# EAGLE board wakeup (EAGLE 7.7.0)
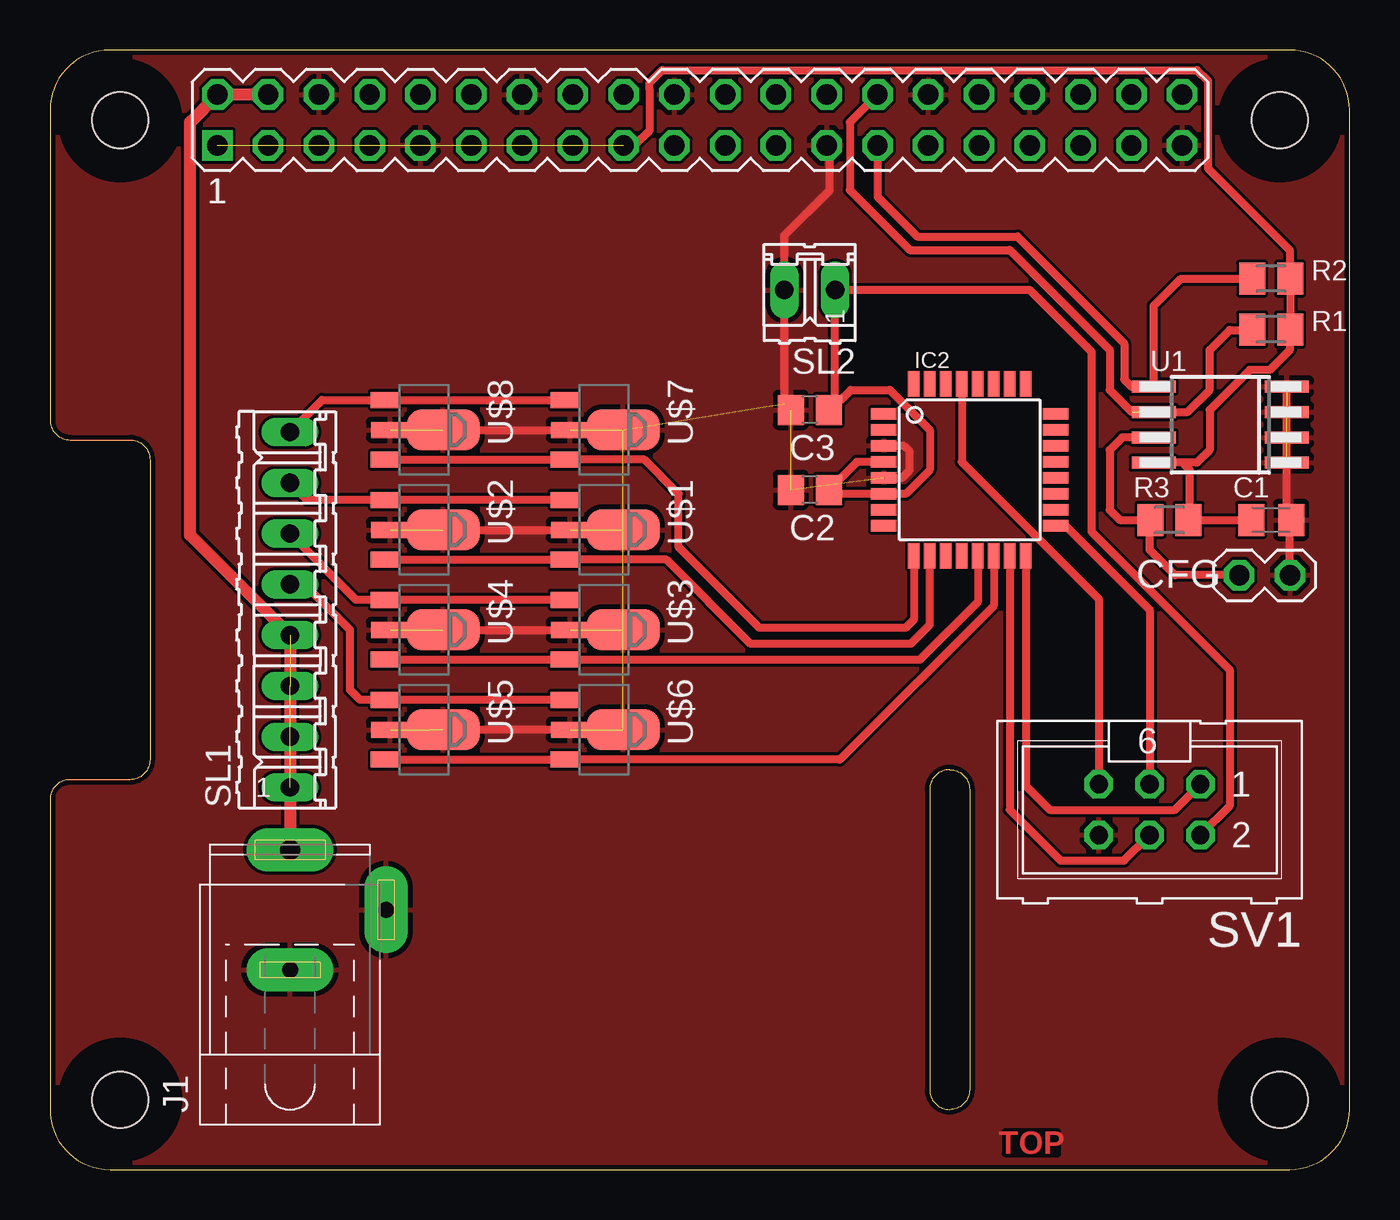
[diagram p0: board, top side]
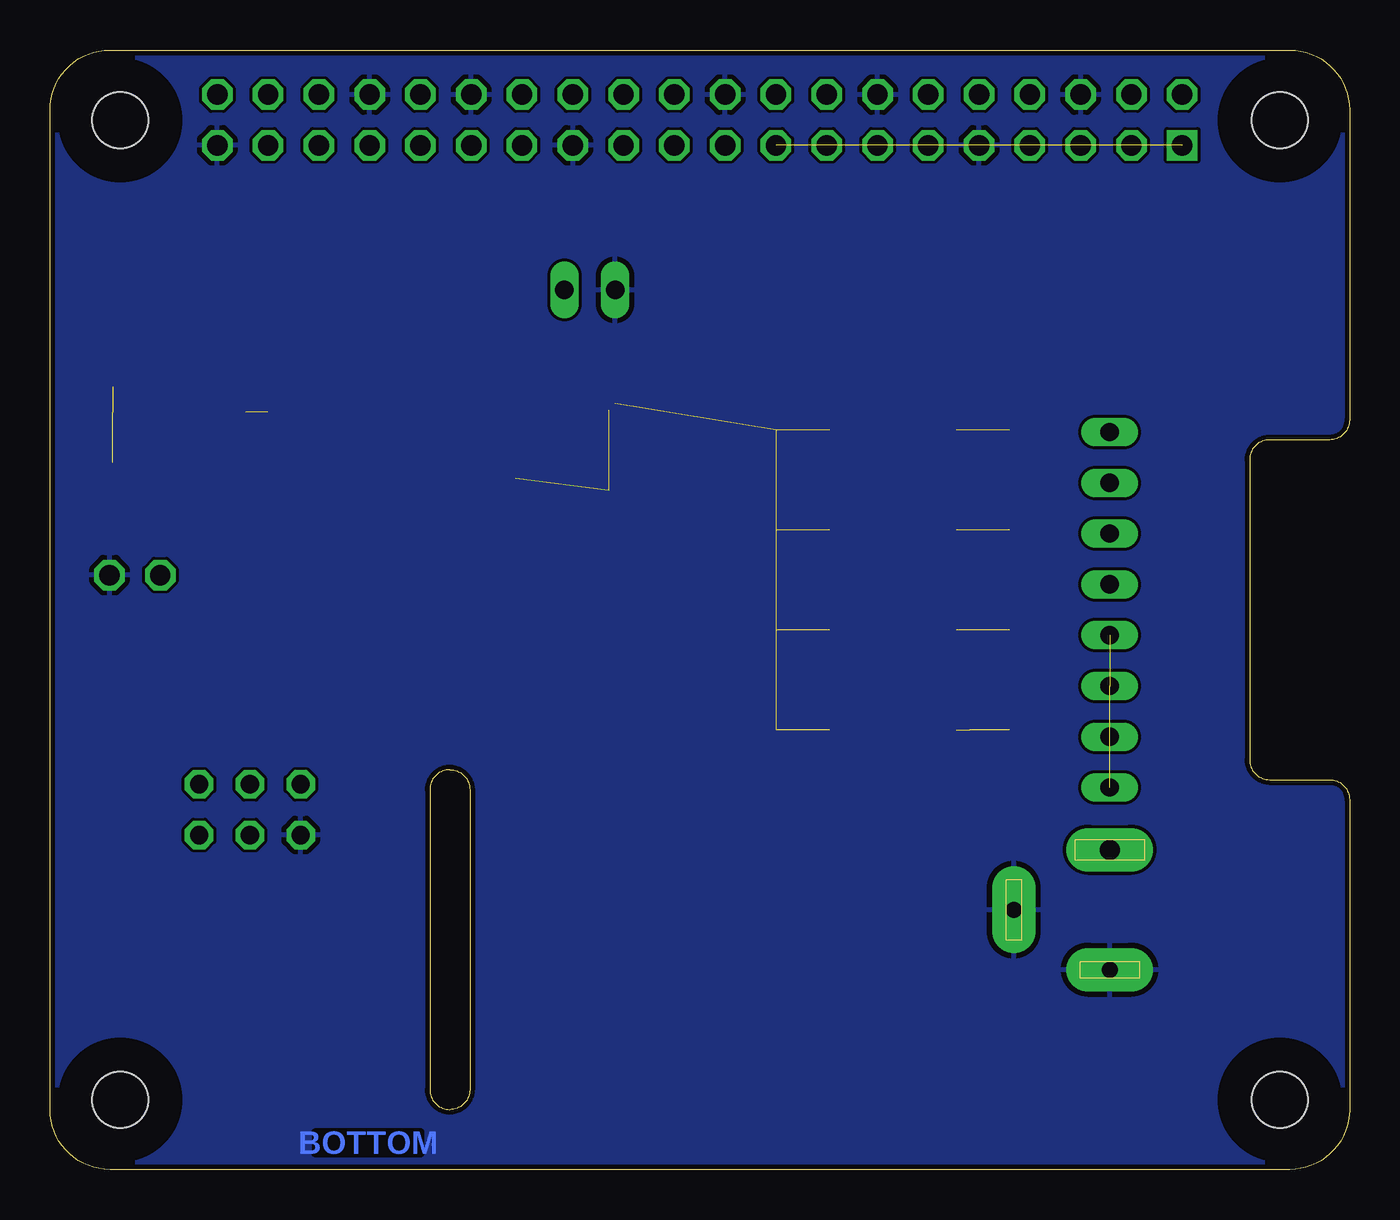
[diagram p1: board, bottom side, seen from below]

Size 65 x 56 mm. Coordinates in mm from the lower left corner, seen from the top.
Outline: 0,3 arc90 3,0 62,0 arc90 65,3 65,53 arc90 62,56 3,56 arc90 0,53 0,37.5 arc90 1,36.5 4,36.5 arc-90 5,35.5 5,20.5 arc-90 4,19.5 1,19.5 arc90 0,18.5 0,3
Outline: 44,19 44,4 arc90 45,3 arc90 46,4 46,19 arc90 45,20 arc90 44,19
Copper layers (1*16): Top 0.035mm / dielectric 1.5mm / Bottom 0.035mm
Design rules "ITEADstudio_DRC *": minimum track width 6mil, minimum drill 12mil, track to track 6mil, track to pad 6mil, pad to pad 6mil, via to via 6mil, smd to smd 0mil, copper to edge 10mil, drill to drill 10mil, minimum pad ring 10mil, minimum via ring 6mil, stop-mask expansion 2mil, vias tented up to drill 100mil, thermal gap 10mil
Holes 2.8 mm at 3.5,3.5 3.5,52.5 61.5,52.5 61.5,3.5
tRestrict: area 1.9,51 to 5,54; area 60,51 to 63,54; area 60,1.9 to 63,5; area 1.9,1.9 to 5,5
bRestrict: area 1.9,1.9 to 5,5; area 1.9,51 to 5,54; area 60,1.9 to 63,5; area 60,51 to 63,54
Milling: 6 lines

## Footprints (pad centres in the part's own frame; a part is rotated, then mirrored left to right if it is on the bottom)
C0805K = smd 1.3 x 1.6: 1 -1,0; 2 1,0
C0805 = smd 1.3 x 1.5: 1 -0.95,0; 2 0.95,0
PIN_W_2 = drill 1.016 octagon: 1 0,0; 2 0,-2.54
TQFP32-08 = smd 1.27 x 0.559: 1 -4.293,2.8; 2 -4.293,2; 3 -4.293,1.2; 4 -4.293,0.4; 5 -4.293,-0.4; 6 -4.293,-1.2; 7 -4.293,-2; 8 -4.293,-2.8; 17 4.293,-2.8; 18 4.293,-2; 19 4.293,-1.2; 20 4.293,-0.4; 21 4.293,0.4; 22 4.293,1.2; 23 4.293,2; 24 4.293,2.8 | smd 0.559 x 1.27: 9 -2.8,-4.293; 10 -2,-4.293; 11 -1.2,-4.293; 12 -0.4,-4.293; 13 0.4,-4.293; 14 1.2,-4.293; 15 2,-4.293; 16 2.8,-4.293; 25 2.8,4.293; 26 2,4.293; 27 1.2,4.293; 28 0.4,4.293; 29 -0.4,4.293; 30 -1.2,4.293; 31 -2,4.293; 32 -2.8,4.293
SPC4078 = drill 0.8 pad 2.184 long: 1 -3,0; 2 0,-4.8 | drill 1 pad 2.184 long: 3 3,0
PIN_20X2 = drill 1.016 square: 1 -24.13,-1.27 | drill 1.016 octagon: 2 -24.13,1.27; 3 -21.59,-1.27; 4 -21.59,1.27; 5 -19.05,-1.27; 6 -19.05,1.27; 7 -16.51,-1.27; 8 -16.51,1.27; 9 -13.97,-1.27; 10 -13.97,1.27; 11 -11.43,-1.27; 12 -11.43,1.27; 13 -8.89,-1.27; 14 -8.89,1.27; 15 -6.35,-1.27; 16 -6.35,1.27; 17 -3.81,-1.27; 18 -3.81,1.27; 19 -1.27,-1.27; 20 -1.27,1.27; 21 1.27,-1.27; 22 1.27,1.27; 23 3.81,-1.27; 24 3.81,1.27; 25 6.35,-1.27; 26 6.35,1.27; 27 8.89,-1.27; 28 8.89,1.27; 29 11.43,-1.27; 30 11.43,1.27; 31 13.97,-1.27; 32 13.97,1.27; 33 16.51,-1.27; 34 16.51,1.27; 35 19.05,-1.27; 36 19.05,1.27; 37 21.59,-1.27; 38 21.59,1.27; 39 24.13,-1.27; 40 24.13,1.27
M0805 = smd 1.3 x 1.6: 1 -0.95,0; 2 0.95,0
08P = drill 0.914 long: 1 -8.89,0; 2 -6.35,0; 3 -3.81,0; 4 -1.27,0; 5 1.27,0; 6 3.81,0; 7 6.35,0; 8 8.89,0
02P = drill 0.914 long: 1 -1.27,0; 2 1.27,0
ML6 = drill 0.914 octagon: 1 -2.54,-1.27; 2 -2.54,1.27; 3 0,-1.27; 4 0,1.27; 5 2.54,-1.27; 6 2.54,1.27
SOIC8 = smd 0.6 x 2.2: 1 -1.905,-3.33; 2 -0.635,-3.33; 3 0.635,-3.33; 4 1.905,-3.33; 5 1.905,3.33; 6 0.635,3.33; 7 -0.635,3.33; 8 -1.905,3.33
SOT = smd 0.8 x 1.4: 1 -1.499,-3.251; 3 1.499,-3.251 | smd 0.8 x 1.9: 2 0,-2.997 | smd 2.032 x 3.65: 2@1 0,-0.33

## Placement (x,y rotation side)
C1  100nF  [C0805K]  61.08,32.5 0 top
C2  47nF  [C0805]  38,34 180 top
C3  47nF  [C0805]  38,38 180 top
CFG  [PIN_W_2]  59.48,29.73 90 top
IC2  ATMEGA48/88/168-AU  [TQFP32-08]  46,35 0 top
J1  [SPC4078]  12,13 90 top
K1  PIN20X2  [PIN_20X2]  32.5,52.5 0 top
R1  3k9  [M0805]  61.08,42.02 0 top
R2  3k9  [M0805]  61.08,44.56 0 top
R3  1k  [M0805]  55.99,32.5 0 top
SL1  [08P]  12,28 90 top
SL2  [02P]  38,44 180 top
SV1  [ML6]  55,18 180 top
U1  EEPROM24  [SOIC8]  58.53,37.26 90 top
U$1  AMC7135  [SOT]  29,32 270 top
U$2  AMC7135  [SOT]  20,32 270 top
U$3  AMC7135  [SOT]  29,27 270 top
U$4  AMC7135  [SOT]  20,27 270 top
U$5  AMC7135  [SOT]  20,22 270 top
U$6  AMC7135  [SOT]  29,22 270 top
U$7  AMC7135  [SOT]  29,37 270 top
U$8  AMC7135  [SOT]  20,37 270 top

## Library data of the parts
C1 = resistor; DIELECTRIC: X7R
C2 C3 = rcl
CFG K1 U1 = FLYFISH
IC2 = atmega8
J1 = con-jack; OC_FARNELL: unknown; OC_NEWARK: unknown
R1-R3 = resistor; TOLERANCE: 5%
SL1 SL2 = con-amp-quick; OC_FARNELL: unknown; OC_NEWARK: unknown
SV1 = con-ml; OC_FARNELL: unknown; OC_NEWARK: unknown
U$1-U$8 = 1

## Nets
+3V3: C1.1 K1.1 K1.17 R1.2 R2.2 R3.2 U1.8
+5V: J1.3 K1.2 K1.4 SL1.1 SL1.2 SL1.3 SL1.4
AGND: IC2.21
BLUE_LED: IC2.13 U$3.3 U$4.3
BLUE_LED_OUT: SL1.6 U$3.1 U$4.1
GND: C1.2 C2.2 C3.2 CFG.2 IC2.3 IC2.5 J1.1 J1.2 K1.6 K1.9 K1.14 K1.20 K1.25 K1.30 K1.34 K1.39 SL2.2 SV1.6 U1.1 U1.2 U1.3 U1.4 U$1.2 U$1.2@1 U$2.2 U$2.2@1 U$3.2 U$3.2@1 U$4.2 U$4.2@1 U$5.2 U$5.2@1 U$6.2 U$6.2@1 U$7.2 U$7.2@1 U$8.2 U$8.2@1
GREEN_LED: IC2.10 U$1.3 U$2.3
GREEN_LED_OUT: SL1.7 U$1.1 U$2.1
I2C_SCL1: K1.5
I2C_SDA1: K1.3
MISO: IC2.16 SV1.1
MISO_SPI: K1.21
MOSI: IC2.15 SV1.4
MOSI_SPI: K1.19
N$3: CFG.1 R3.1 U1.7
RED_LED: IC2.9 U$7.3 U$8.3
RED_LED_OUT: SL1.8 U$7.1 U$8.1
RESET: IC2.29 SV1.5
SCK: IC2.17 SV1.3
SCL0_I2C_ID_EEPROM: K1.28 R1.1 U1.6
SCLK_SPI: K1.23
SDA0_I2C_ID_EEPROM: K1.27 R2.1 U1.5
VCC: C2.1 C3.1 IC2.4 IC2.6 SL2.1 SV1.2
WHITE_LED: IC2.14 U$5.3 U$6.3
WHITE_LED_OUT: SL1.5 U$5.1 U$6.1

## Tracks (layer width: path | path; a pad name or v marks a point on that pad's centre or on a via)
+3V3  (1 unrouted)
  Top 0.406: C1.1 R3.2 57,32.55 57,35 56.65,35.35 | 56.65,35.35 57.35,35.35 58,36 58,38 60,40 61,40 62.02,41.02 R1.2 R2.2 62,44.59 62,46 57.92,50.08 57.92,54.45 57.37,55 30.62,55 30,54.38 30,54 30,52 29.23,51.23 K1.17 | 56.65,35.35 U1.8
+5V  (3 unrouted)
  Top 0.61: K1.4 K1.2 7,52.4 7,31.73 SL1.4 J1.3
BLUE_LED
  Top 0.406: U$4.3 U$3.3 43.5,25.5 46.4,28.4 IC2.13
BLUE_LED_OUT
  Top 0.406: U$3.1 U$4.1 15.31,28.5 SL1.6
GND  (18 unrouted)
  Top 0.406: U1.4 61.87,32.71 C1.2 62,32.42 62,30 62.02,29.98 CFG.2 | K1.25 39,51.08 39,49 36.73,46.73 SL2.2 36.73,38.32 C3.2 | U$8.2@1 U$7.2 | U$2.2@1 U$1.2 | U$4.2@1 U$3.2 | U$6.2 19,22 | IC2.5 42.6,34.6 43,35 43,35.9 42.71,36.19 IC2.3
  pour Bottom: 0,3 arc90 3,0 62,0 arc90 65,3 65,53 arc90 62,56 3,56 arc90 0,53 0,37.5 arc90 1,36.5 4,36.5 arc-90 5,35.5 5,20.5 arc-90 4,19.5 1,19.5 arc90 0,18.5
  pour Top: 0,3 arc90 3,0 62,0 arc90 65,3 65,53 arc90 62,56 3,56 arc90 0,53 0,37.5 arc90 1,36.5 4,36.5 arc-90 5,35.5 5,20.5 arc-90 4,19.5 1,19.5 arc90 0,18.5
GREEN_LED
  Top 0.406: U$2.3 U$1.3 30.84,30.5 35.04,26.29 43.04,26.29 44,27.25 IC2.10
GREEN_LED_OUT
  Top 0.406: U$1.1 U$2.1 12.85,33.5 SL1.7
MISO
  Top 0.406: IC2.16 48.8,19.2 50,18 56.27,18 SV1.1
MOSI
  Top 0.406: IC2.15 48,18 50.55,15.45 53.72,15.45 SV1.4
N$3
  Top 0.406: CFG.1 56.27,29.73 55,31 55,32.45 R3.1 53.5,32.5 53,33 53,36 53.62,36.62 U1.7
RED_LED
  Top 0.406: U$8.3 U$7.3 29.73,35.5 31.45,33.79 31.45,31.13 35.48,27.1 42.79,27.1 43.2,27.51 IC2.9
RED_LED_OUT
  Top 0.406: U$7.1 U$8.1 13.61,38.5 SL1.8
RESET
  Top 0.406: IC2.29 45.6,35.4 52.46,28.54 SV1.5
SCK
  Top 0.406: IC2.17 50.8,32.2 55,28 SV1.3
SCL0_I2C_ID_EEPROM  (1 unrouted)
  Top 0.406: U1.6 56.9,37.9 58,39 58,41 59,42 60.1,42 R1.1 | K1.28 40,52.38 40,49 43,46 48,46 53,41 53,39 54.1,37.9
SDA0_I2C_ID_EEPROM
  Top 0.406: R2.1 56.56,44.56 55.2,43.2 U1.5 54.09,39.16 53.73,39.51 53.73,41.33 48.39,46.67 43.38,46.67 41.39,48.66 K1.27
VCC
  Top 0.406: IC2.4 40.35,35.4 C2.1 39.15,33.8 IC2.6 42.8,33.8 44,35 44,37 42,39 40.05,39 39,37.95 C3.1 39.27,38.32 SL2.1 49,44 52.11,40.89 52.11,31.89 59,25 59,18.19 SV1.2
WHITE_LED
  Top 0.406: U$5.3 U$6.3 39.5,20.5 47.2,28.2 IC2.14
WHITE_LED_OUT
  Top 0.406: U$6.1 U$5.1 15.5,23.5 15,24 15,27 12.73,29.27 SL1.5

## Text on the board
Top: TOP
Bottom: BOTTOM